# Altium PCB SD171-5.0PCB2.PcbDoc (part 5 of 5)
Units mm, origin at the board's own origin, x right, y up, seen from the top; angles counter-clockwise.
Board outline 152.27 x 99.6 mm, 6 copper layers (Top Layer, InternalPlane1, Mid-Layer 1, Mid-Layer 2, InternalPlane2, Bottom Layer); 325 components, 250 nets, 1794 pads, 490 vias.
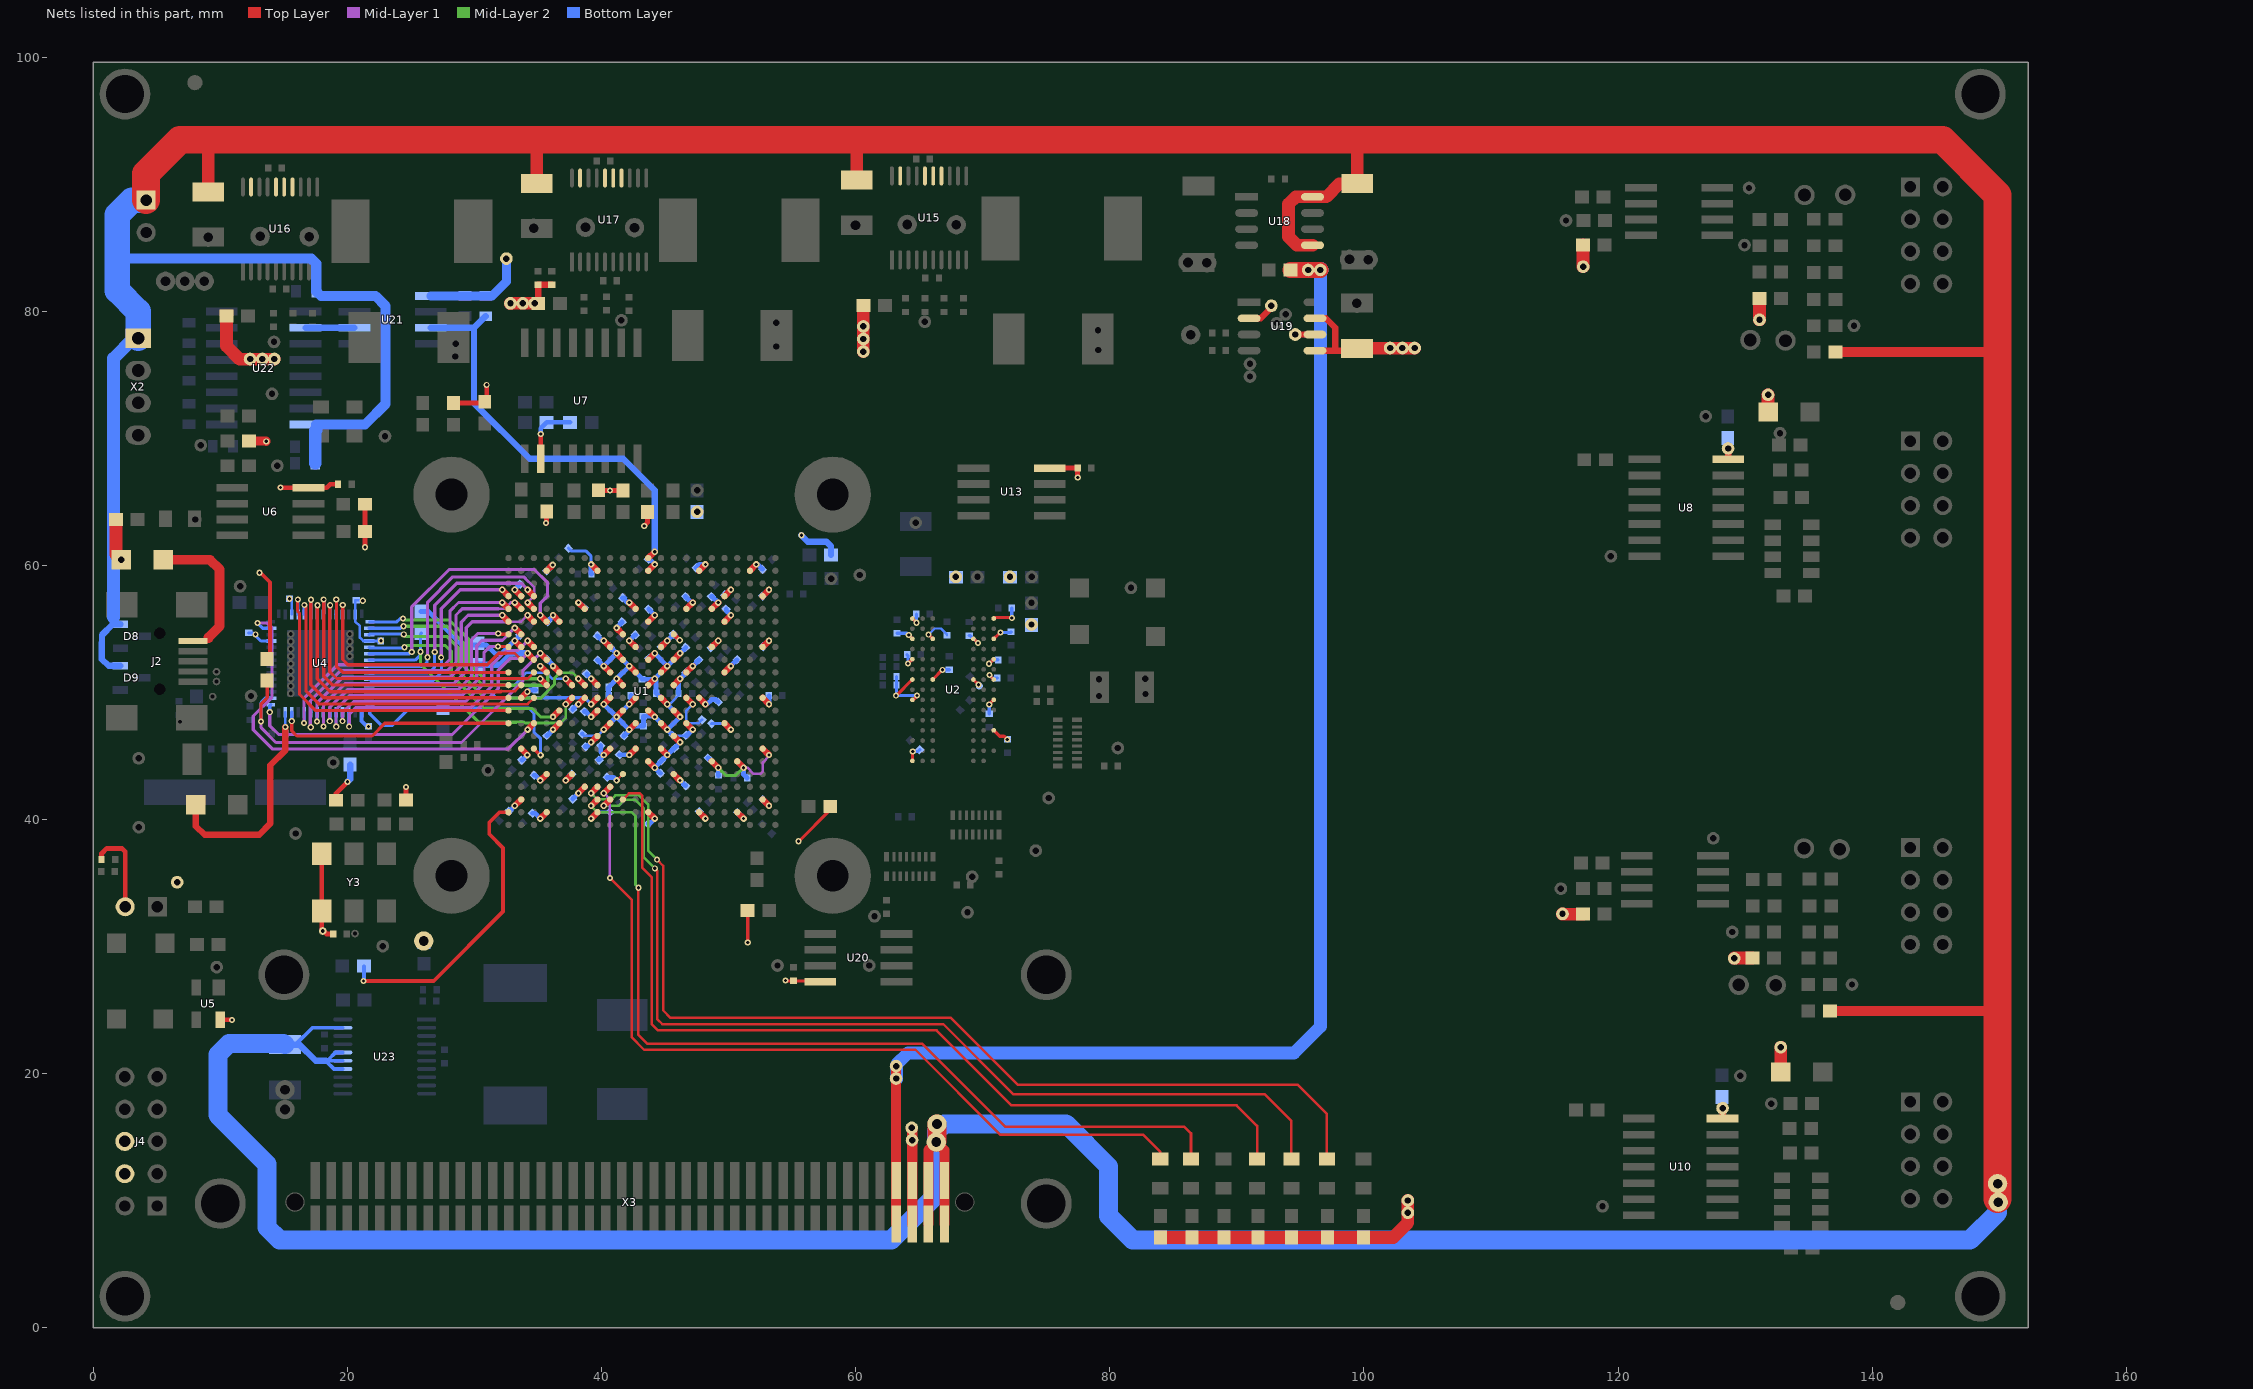
[diagram p9: the nets of this part, all layers, seen from the top]

## Via types
v1: diameter 0.508, hole 0.254, Top Layer to Bottom Layer, 259 vias
v2: diameter 0.483, hole 0.254, Top Layer to Bottom Layer, 230 vias
v3: diameter 0.483, hole 0.254, Top Layer to Bottom Layer, tented top, 1 vias

## Nets (pads, with @x,y where several pads share a name; then routed paths per layer and width w, separated by ;. In a path a pad name is that pad's centre, name@x,y a point inside that pad or via, vN(x,y) a via of type N, cw(c..) or ccw(c..) an arc to the next point about the centre after c; other vN are vias at no path point) (continued)
TEST3: D15.2 U1.C13 | length 73.7
  Top Layer w0.203: U1.C13@41.68,41.589 42.159,42.067 43.023,42.067 43.201,41.889 43.201,36.224 43.942,35.484 43.942,23.927 44.45,23.419 66.37,23.419 72.263,17.526 89.967,17.526 91.592,15.9 D15.2@91.592,13.284
TEST4: D16.2 U1.C14 | length 77.6
  Top Layer w0.203: v2(44.196,36.17) 44.399,35.966 44.399,24.282 44.78,23.901 66.904,23.901 72.415,18.39 92.202,18.39 94.285,16.307 D16.2@94.285,13.284
  Top Layer w0.5: v1(40.18,41.089) U1.C14@40.68,41.589
  Mid-Layer 2 w0.203: v1(40.18,41.089) 41.317,41.089 41.808,41.58 42.621,41.58 43.332,40.869 43.332,37.033 v2(44.196,36.17)
TEST5: D12.2 U1.D14 | length 66.7
  Top Layer w0.203: v2(40.665,35.408) 42.367,33.706 42.367,22.885 43.358,21.895 64.694,21.895 71.374,15.215 82.601,15.215 83.972,13.843 D12.2@83.972,13.284
  Top Layer w0.5: v1(40.18,42.089) U1.D14@40.68,42.589
  Mid-Layer 1 w0.203: v1(40.18,42.089) 40.663,41.606 40.663,35.41 v2(40.665,35.408)
TEST6: D13.2 U1.C15 | length 70.6
  Top Layer w0.203: v2(42.901,34.646) 42.901,23.063 43.612,22.352 65.253,22.352 71.755,15.85 85.852,15.85 86.385,15.316 D13.2@86.385,13.284
  Top Layer w0.5: v1(39.18,41.089) U1.C15@39.68,41.589
  Mid-Layer 2 w0.203: v1(39.18,41.089) 39.697,40.571 42.38,40.571 42.663,40.289 42.663,40.268 42.672,40.259 42.672,34.874 v2(42.901,34.646)
TEST7: D17.2 U1.D15 | length 81.7
  Top Layer w0.203: v2(44.374,36.855) 44.856,36.373 44.856,24.994 45.441,24.409 67.488,24.409 72.746,19.152 94.767,19.152 97.079,16.84 D17.2@97.079,13.284
  Top Layer w0.5: v1(39.18,42.089) U1.D15@39.68,42.589
  Mid-Layer 2 w0.203: v1(39.18,42.089) 39.663,41.606 40.793,41.606 41.097,41.91 42.951,41.91 43.663,41.199 43.663,37.567 v2(44.374,36.855)
TXD: U21.6 U22.10 | length 3.8
  Bottom Layer w0.508: U22.10@16.713,78.715 16.721,78.707 U21.6@20.558,78.707
TXD0: R88.1 U1.AB11 U21.3 | length 33.2
  Top Layer w0.5: U1.AB11@43.68,60.589 v1(44.18,61.089)
  Bottom Layer w0.508: U21.3@26.558,78.707 29.964,78.707 ; R88.1@30.886,79.629 29.964,78.707 ; v1(44.18,61.089) 44.18,65.929 41.707,68.402 34.341,68.402 29.964,72.779 29.964,78.707
UD0: U1.K22 U4.18 | length 25.7
  Top Layer w0.254: v2(16.104,57.328) 16.078,57.302 16.078,56.413 16.231,56.261 16.231,49.855 17.497,48.589 U1.K22@32.68,48.589
  Bottom Layer w0.254: v2(16.104,57.328) 16.078,57.328 16.117,57.289 U4.18@16.117,56.159
UD1: U1.L20 U4.19 | length 26.1
  Top Layer w0.203: 32.309,49.098 34.189,49.098 U1.L20@34.68,49.589
  Top Layer w0.254: v2(16.612,56.896) 16.739,56.77 16.739,55.524 16.739,50.14 17.78,49.098 32.309,49.098
  Bottom Layer w0.254: v2(16.612,56.896) 16.612,56.164 U4.19@16.617,56.159
UD2: U1.L22 U4.20 | length 23.9
  Top Layer w0.254: v2(17.145,57.302) 17.12,57.328 17.12,50.622 18.153,49.589 U1.L22@32.68,49.589
  Bottom Layer w0.254: U4.20@17.117,56.159 17.145,56.187 v2(17.145,57.302)
UD3: U1.M21 U4.21 | length 23.3
  Top Layer w0.203: 32.106,50.114 32.11,50.11 33.201,50.11 U1.M21@33.68,50.589
  Top Layer w0.254: v2(17.653,56.871) 17.628,56.871 17.628,51.079 18.644,50.063 30.658,50.063 32.063,50.063 32.11,50.11
  Bottom Layer w0.254: U4.21@17.617,56.159 17.617,56.86 17.628,56.871 v2(17.653,56.871)
UD4: U1.M22 U4.22 | length 22.1
  Top Layer w0.254: v2(18.136,57.328) 18.148,57.315 18.148,51.295 18.855,50.589 U1.M22@32.68,50.589
  Bottom Layer w0.254: U4.22@18.117,56.159 18.148,56.191 18.148,57.34 v2(18.136,57.328)
UD5: U1.N20 U4.23 | length 22.4
  Top Layer w0.203: 32.238,51.11 34.201,51.11 U1.N20@34.68,51.589
  Top Layer w0.254: v2(18.644,56.871) 18.618,56.845 18.618,51.638 19.146,51.11 32.238,51.11
  Bottom Layer w0.254: U4.23@18.617,56.159 18.617,56.844 v2(18.644,56.871)
UD6: U1.N22 U4.24 | length 20.2
  Top Layer w0.254: v2(19.126,57.328) 19.139,57.315 19.139,52.083 19.633,51.589 U1.N22@32.68,51.589
  Bottom Layer w0.254: U4.24@19.117,56.159 19.139,56.181 19.139,57.315 v2(19.126,57.328)
UD7: U1.P21 U4.25 | length 19.8
  Top Layer w0.203: 32.467,53.089 33.18,53.089 U1.P21@33.68,52.589
  Top Layer w0.254: v2(19.634,56.896) 19.634,52.603 20.041,52.197 31.013,52.197 31.905,53.089 32.467,53.089
  Bottom Layer w0.254: U4.25@19.617,56.159 19.617,56.888 19.625,56.896 v2(19.634,56.896)
UD8: U1.R20 U4.45 | length 20.3
  Top Layer w0.5: v1(34.18,54.089) U1.R20@34.68,53.589
  Mid-Layer 1 w0.254: v2(20.142,47.32) 20.142,48.311 20.65,48.819 29.693,48.819 31.369,50.495 31.369,52.197 32.487,53.315 33.406,53.315 v1(34.18,54.089)
  Bottom Layer w0.254: U4.45@20.117,48.459 20.117,47.345 v2(20.142,47.32)
UD9: U1.R22 U4.46 | length 18
  Top Layer w0.152: U1.R22@32.649,53.619 U1.R22@32.68,53.589
  Top Layer w0.254: v2(31.852,53.619) U1.R22@32.649,53.619
  Mid-Layer 1 w0.254: v2(19.609,47.752) 19.609,48.412 20.498,49.301 29.312,49.301 30.759,50.749 30.759,53.188 31.191,53.619 v2(31.852,53.619)
  Bottom Layer w0.254: v2(19.609,47.752) 19.617,47.76 U4.46@19.617,48.459
UD10: U1.T21 U4.47 | length 21.6
  Top Layer w0.5: v1(33.18,55.089) U1.T21@33.68,54.589
  Mid-Layer 1 w0.254: v2(19.126,47.32) 19.113,47.333 19.113,48.679 20.193,49.759 29.007,49.759 30.175,50.927 30.175,53.696 30.594,54.115 32.206,54.115 v1(33.18,55.089)
  Bottom Layer w0.254: U4.47@19.117,48.459 19.113,48.456 19.113,47.307 v2(19.126,47.32)
UD11: U1.T22 U4.48 | length 20
  Top Layer w0.254: v2(31.877,54.661) 31.949,54.589 U1.T22@32.68,54.589
  Mid-Layer 1 w0.254: v2(18.618,47.752) 18.618,48.844 20.015,50.241 28.727,50.241 29.769,51.283 29.769,54.153 30.277,54.661 30.836,54.661 v2(31.877,54.661)
  Bottom Layer w0.254: U4.48@18.617,48.459 v2(18.618,47.752) v2(18.618,47.752)
UD12: U1.U20 U4.49 | length 24.5
  Top Layer w0.5: v1(34.18,56.089) U1.U20@34.68,55.589
  Mid-Layer 1 w0.203: 32.69,55.575 33.666,55.575 v1(34.18,56.089)
  Mid-Layer 1 w0.254: v2(18.117,47.339) 18.117,49.003 19.812,50.698 28.372,50.698 29.362,51.689 29.362,55.118 29.825,55.581 32.684,55.581 32.69,55.575
  Bottom Layer w0.254: v2(18.117,47.339) U4.49@18.117,48.459
UD13: U1.U22 U4.50 | length 22.4
  Top Layer w0.5: v1(32.18,56.089) U1.U22@32.68,55.589
  Mid-Layer 1 w0.254: v2(17.602,47.727) 17.602,49.174 19.634,51.206 28.092,51.206 28.956,52.07 28.956,55.55 29.495,56.089 v1(32.18,56.089)
  Bottom Layer w0.254: v2(17.602,47.727) 17.606,47.727 17.617,47.737 U4.50@17.617,48.459
UD14: U1.V21 U4.51 | length 25.5
  Top Layer w0.5: v1(33.18,57.089) U1.V21@33.68,56.589
  Mid-Layer 1 w0.203: 31.877,56.591 32.365,56.591 32.862,57.089 v1(33.18,57.089)
  Mid-Layer 1 w0.254: v2(17.12,47.269) 17.081,47.307 17.081,49.34 19.456,51.714 27.864,51.714 28.55,52.4 28.55,56.109 29.032,56.591 31.877,56.591
  Bottom Layer w0.254: U4.51@17.117,48.459 17.107,48.449 17.107,47.282 v2(17.12,47.269)
UD15: U1.V22 U4.52 | length 24.5
  Top Layer w0.5: v1(32.18,57.089) U1.V22@32.68,56.589
  Mid-Layer 1 w0.254: v2(16.586,47.6) 16.586,49.555 19.228,52.197 27.661,52.197 28.067,52.603 28.067,56.413 28.742,57.089 v1(32.18,57.089)
  Bottom Layer w0.254: U4.52@16.617,48.459 16.617,47.63 16.612,47.625 v2@16.637,47.625
USB3V3: C47.2 C48.2 C49.2 C50.2 C51.2 C52.2 L2.2 pad.2@26.01,30.455 R94.2 U4.11 U4.17 U4.27 U4.32 U4.43 U4.55 | length 28.3
  Top Layer w0.203: v2(21.209,57.226) v2@21.234,57.201
  Top Layer w0.5: L2.2@8.077,41.173 8.077,39.497 8.763,38.811 13.056,38.811 13.945,39.7 13.945,44.272 15.117,45.445 v2(15.117,47.295)
  Bottom Layer w0.203: U4.55@15.117,48.459 v2(15.117,47.295) 15.117,46.776 C49.2@15.131,46.762 ; C52.2@15.375,57.455 15.617,57.213 U4.17@15.617,56.159 ; v2(21.209,57.226) 21.209,57.252 21.201,57.259 20.625,57.259 20.617,57.251 U4.27@20.617,56.159 20.617,55.608 20.98,55.245 20.98,54.331 21.252,54.059 U4.32@21.717,54.059 22.622,54.059 v2(22.639,54.076)
  Bottom Layer w0.254: C50.2@12.242,54.686 12.573,54.686 13.2,54.059 U4.11@14.017,54.059
  Bottom Layer w0.3: U4.43@21.117,48.409 21.117,47.777 21.556,47.338 v2(21.666,47.338)
  other v2: 12.776,54.585 15.444,57.386
USB5V: J2.1 L3.1 | length 10.5
  Top Layer w0.762: L3.1@5.512,60.452 9.195,60.452 9.931,59.715 9.931,55.22 9.068,54.356 9.068,54.28
USB_CLKOUT: U1.J22 U4.54 | length 18.9
  Top Layer w0.152: U1.J22@32.672,47.581 U1.J22@32.68,47.589
  Top Layer w0.254: v2@15.621,47.549 15.621,46.99 16.027,46.584 21.946,46.584 22.943,47.581 U1.J22@32.672,47.581
  Bottom Layer w0.254: U4.54@15.617,48.459 15.621,48.455 v2(15.621,47.752)
USB_EN: R96.1 U1.B22 | length 23.8
  Top Layer w0.3: v2(21.26,27.305) 26.797,27.305 32.258,32.766 32.258,37.77 31.166,38.862 31.166,39.776 31.978,40.589 U1.B22@32.68,40.589
  Bottom Layer w0.3: v2(21.26,27.305) 21.298,27.343 R96.1@21.298,28.473
USB_FADDR0: U1.W20 U4.37 | length 19.2
  Top Layer w0.5: v1(34.18,58.089) U1.W20@34.68,57.589
  Mid-Layer 1 w0.203: v1@34.03,58.238 v1(34.18,58.089)
  Mid-Layer 1 w0.254: v2(26.873,53.188) 26.873,56.871 28.6,58.598 33.671,58.598 v1@34.03,58.238
  Bottom Layer w0.254: U4.37@21.717,51.559 26.439,51.559 26.848,51.968 26.848,53.188 v2(26.873,53.188)
USB_FADDR1: U1.W22 U4.38 | length 17.1
  Top Layer w0.5: v1(32.18,58.089) U1.W22@32.68,57.589
  Mid-Layer 1 w0.254: v2(27.381,52.756) 27.381,56.591 28.879,58.089 v1(32.18,58.089)
  Bottom Layer w0.254: U4.38@21.717,51.059 21.823,50.953 26.773,50.953 27.407,51.587 27.407,52.73 v2(27.381,52.756)
USB_FLAGA#: U1.M19 U4.29 | length 17.3
  Top Layer w0.5: v1(35.18,51.089) U1.M19@35.68,50.589
  Mid-Layer 2 w0.254: v2(24.384,55.829) 24.384,55.804 24.473,55.715 28.029,55.715 29.616,54.127 29.616,52.248 30.775,51.089 v1(35.18,51.089)
  Bottom Layer w0.254: U4.29@21.767,55.559 23.886,55.559 24.155,55.829 v2(24.384,55.829)
USB_FLAGB#: U1.N19 U4.30 | length 19.4
  Top Layer w0.5: v1(35.18,52.089) U1.N19@35.68,51.589
  Mid-Layer 2 w0.254: v2(24.409,55.22) 27.813,55.22 29.185,53.848 29.185,52.045 30.648,50.581 35.442,50.581 35.763,50.902 35.763,51.506 v1(35.18,52.089)
  Bottom Layer w0.254: U4.30@21.717,55.059 24.173,55.059 24.333,55.22 v2(24.409,55.22)
USB_FLAGC#: U1.M16 U4.31 | length 21.7
  Top Layer w0.5: v1(38.18,51.089) U1.M16@38.68,50.589
  Mid-Layer 2 w0.203: 36.728,51.562 36.738,51.571 37.697,51.571 v1(38.18,51.089)
  Mid-Layer 2 w0.254: v2(24.435,54.585) 24.613,54.407 27.864,54.407 28.727,53.543 28.727,51.689 30.848,49.568 35.217,49.568 36.297,50.648 36.297,51.13 36.728,51.562
  Bottom Layer w0.254: U4.31@21.717,54.559 21.767,54.61 24.41,54.61 v2(24.435,54.585)
USB_FLAGD: U1.L15 U4.40 | length 18.6
  Top Layer w0.5: v1(39.18,49.089) U1.L15@39.68,49.589
  Bottom Layer w0.254: U4.40@21.717,50.059 31.246,50.059 31.737,49.568 34.368,49.568 34.397,49.597 38.672,49.597 v1(39.18,49.089)
USB_IFCLK: U1.J20 U4.13 | length 34.8
  Top Layer w0.5: v1(34.18,47.089) U1.J20@34.68,47.589
  Mid-Layer 1 w0.152: v1(34.18,47.089) v1@34.18,47.156
  Mid-Layer 1 w0.254: v2(12.929,55.474) 13.691,55.474 14.072,55.093 14.072,49.632 12.598,48.158 12.598,47.066 14.097,45.568 32.659,45.568 v1(34.18,47.089)
  Bottom Layer w0.254: v2(12.929,55.474) 13.343,55.059 U4.13@14.017,55.059
USB_INT0: U1.K18 U4.33 | length 18.7
  Top Layer w0.5: v1(36.18,48.089) U1.K18@36.68,48.589
  Mid-Layer 2 w0.254: v2(24.486,53.569) 24.625,53.708 27.711,53.708 28.169,53.251 28.169,51.359 30.776,48.751 34.536,48.751 35.198,48.089 v1(36.18,48.089)
  Bottom Layer w0.254: U4.33@21.717,53.559 21.759,53.518 24.308,53.518 24.409,53.619 24.46,53.569 v2(24.486,53.569)
USB_INT1: U1.U19 U4.34 | length 22.8
  Top Layer w0.5: v1(35.18,56.089) U1.U19@35.68,55.589
  Mid-Layer 1 w0.254: v2(25.07,53.188) 25.07,56.744 28.016,59.69 34.722,59.69 35.738,58.674 35.738,57.582 35.18,57.024 v1(35.18,56.089)
  Bottom Layer w0.254: U4.34@21.717,53.059 24.891,53.059 25.044,53.213 v2(25.07,53.188)
USB_PKEND: U1.M17 U4.39 | length 16.8
  Top Layer w0.5: v1(37.18,51.089) U1.M17@37.68,50.589
  Bottom Layer w0.203: U4.39@21.717,50.559 33.096,50.559 34.108,51.571 35.652,51.571 36.135,51.089 v1(37.18,51.089)
USB_RST#: R90.2 U1.G20 U4.42 | length 19
  Top Layer w0.254: U1.G20@34.68,45.589 35.184,45.085 v1(35.204,45.085)
  Bottom Layer w0.254: U4.42@21.767,49.059 21.767,48.337 22.682,47.422 23.546,47.422 24.917,48.793 34.262,48.793 34.688,48.367 34.688,46.878 35.204,46.362 v1(35.204,45.085)
USB_SLOE: R91.2 U1.L17 U4.35 | length 22.3
  Top Layer w0.254: v2@25.705,53.162 v2(25.756,53.213)
  Top Layer w0.5: v1(37.18,49.089) U1.L17@37.68,49.589
  Mid-Layer 2 w0.203: 33.299,47.676 33.299,47.701 33.885,47.701 33.98,47.606 36.786,47.606 37.18,48 v1(37.18,49.089)
  Mid-Layer 2 w0.254: v2(25.756,53.213) 25.756,52.248 30.328,47.676 33.299,47.676
  Bottom Layer w0.254: U4.35@21.717,52.559 25.331,52.559 25.756,52.984 v2(25.756,53.213) 25.756,54.623 R91.2@25.806,54.673
USB_SLRD#: R92.2 U1.P20 U4.1 | length 30.7
  Top Layer w0.5: v1(34.18,53.089) U1.P20@34.68,52.589
  Mid-Layer 1 w0.254: v2(13.894,48.463) 13.894,47.396 14.58,46.711 28.27,46.711 31.877,50.317 31.877,51.765 32.817,52.705 33.796,52.705 v1(34.18,53.089)
  Bottom Layer w0.254: v2(13.894,48.463) 13.894,48.986 U4.1@13.967,49.059
  Bottom Layer w0.5: R92.2@30.277,52.184 32.042,52.184 32.947,53.089 v1(34.18,53.089)
USB_SLWR#: R93.2 U1.P19 U4.2 | length 32.9
  Top Layer w0.254: v2(13.208,47.727) 13.208,49.124 13.691,49.606 R93.2@13.691,50.94
  Top Layer w0.5: v1(35.18,53.089) U1.P19@35.68,52.589
  Mid-Layer 1 w0.254: v2(13.208,47.727) 13.208,47.244 14.376,46.076 28.981,46.076 33.816,50.91 33.816,51.718 35.18,53.082 v1(35.18,53.089)
  Bottom Layer w0.254: v2(13.208,47.727) 13.208,49.225 13.542,49.559 U4.2@14.017,49.559
USB_WU2: U1.V20 U4.36 | length 21.1
  Top Layer w0.5: v1(34.18,57.089) U1.V20@34.68,56.589
  Mid-Layer 1 w0.203: v1(34.18,57.089) 34.697,57.606 34.697,58.292 34.246,58.743
  Mid-Layer 1 w0.254: v2(26.314,52.781) 26.314,57.125 28.296,59.106 33.884,59.106 34.246,58.743
  Bottom Layer w0.203: v2@26.264,52.73 v2(26.314,52.781)
  Bottom Layer w0.254: U4.36@21.717,52.059 25.948,52.059 26.264,52.375 v2@26.264,52.73
VCC1V2: C171.2 C172.2 C173.2 C174.2 C175.2 C176.2 C177.2 C178.2 C179.2 C180.2 C181.2 C182.2 C183.2 C184.2 C185.2 C186.2 C187.2 C188.2 C189.2 C190.2 C191.2 pad.0@32.831,80.63 pad.0@33.807,80.63 pad.0@34.747,80.63 pad.0@47.523,64.224 R77.2 U1.J8 U1.J10 U1.J12 U1.J14 U1.K9 U1.K11 U1.K13 U1.L10 U1.L12 U1.L14 U1.M9 U1.M11 U1.M13 U1.N10 U1.N12 U1.N14 U1.P9 U1.P11 U1.P13 U1.R14 | length 60.1
  Top Layer w0.152: v1(41.18,51.089) v1@41.343,50.925
  Top Layer w0.5: R77.2@35.016,80.63 C191.2@35.016,82.104 C190.2@36.08,82.104 ; v1(40.18,47.089) U1.J14@40.68,47.589 ; v1(40.18,49.089) U1.L14@40.68,49.589 ; v1(40.18,52.089) U1.N14@40.68,51.589 ; v1(40.18,54.089) U1.R14@40.68,53.589 ; v1(41.18,48.089) U1.K13@41.68,48.589 ; v1(41.18,53.089) U1.P13@41.68,52.589 ; v1@41.343,50.925 U1.M13@41.68,50.589 ; v1(42.18,47.089) U1.J12@42.68,47.589 ; v1(42.18,49.089) U1.L12@42.68,49.589 ; v1(42.18,52.089) U1.N12@42.68,51.589 ; U1.K11@43.68,48.589 v1(44.18,48.089) ; U1.M11@43.68,50.589 v1(44.18,51.089) ; U1.P11@43.68,52.589 v1(44.18,53.089) ; U1.J10@44.68,47.589 v1(45.18,47.089) ; U1.L10@44.68,49.589 v1(45.18,49.089) ; U1.N10@44.68,51.589 v1(45.18,52.089) ; U1.K9@45.68,48.589 v1(46.18,48.089) ; U1.M9@45.68,50.589 v1(46.18,51.089) ; U1.P9@45.68,52.589 v1(46.18,53.089) ; U1.J8@46.68,47.589 v1(47.18,47.089)
  Top Layer w1: pad.0@32.817,80.62 pad.0@32.831,80.605 ; pad.0@32.831,80.63 pad.0@33.807,80.63 pad.0@34.747,80.63 34.999,80.63 R77.2@35.016,80.614
  Bottom Layer w0.203: C189.2@38.48,46.762 38.639,46.604 39.695,46.604 v1(40.18,47.089) ; v1@45.18,49.156 45.422,49.156 46.058,49.791 C181.2@46.058,49.936 ; C186.2@45.63,46.622 45.646,46.606 46.606,46.606 C185.2@46.634,46.634
  Bottom Layer w0.381: C172.2@39.662,54.471 40.044,54.089 v1(40.18,54.089) 40.687,53.581 C177.2@40.704,53.581 40.704,53.565 v1(41.18,53.089) ; C174.2@39.687,52.566 40.165,52.089 v1(40.18,52.089) v1(41.18,53.089) ; v1(40.18,47.089) v1(41.18,48.089) ; C182.2@41.77,46.596 42.537,47.363 C184.2@43.307,47.363 43.307,48.116 C179.2@43.282,48.141 44.128,48.141 v1(44.18,48.089) v1(45.18,47.089) ; v1@42.221,47.048 v1(41.18,48.089) ; C178.2@42.309,49.784 42.309,49.218 v1(42.18,49.089) v1(41.18,48.089) ; C173.2@43.726,52.718 43.81,52.718 v1(44.18,53.089) v1(45.18,52.089) ; 44.94,49.301 C180.2@44.292,49.949 44.292,50.976 v1(44.18,51.089) ; v1@45.18,49.156 v1(45.18,49.089) v1(46.18,48.089) v1(45.18,47.089) ; C186.2@45.63,46.622 45.18,47.072 v1(45.18,47.089) ; C181.2@46.058,49.936 v1@46.058,50.967 ; v1(46.18,51.089) 46.634,51.543 C188.2@46.634,51.587 ; C187.2@46.622,53.556 46.622,53.531 v1(46.18,53.089) v1(45.18,52.089) ; C185.2@46.634,46.634 46.726,46.634 v1(47.18,47.089) ; v1(41.18,48.089) v1(40.18,49.089) 40.556,49.465 C183.2@40.556,49.759 C176.2@40.556,50.419 41.18,51.043 v1(41.18,51.089) v1(42.18,52.089) ; v1(41.18,53.089) v1(42.18,52.089) ; v1(42.18,52.089) 43.193,51.076 C175.2@43.193,51.05 44.141,51.05 v1(44.18,51.089) ; v1(44.18,51.089) v1(45.18,52.089)
VCC1V8: C88.2 C89.2 C90.2 C91.2 C92.2 C93.2 C94.2 C95.2 C96.2 C97.2 C98.2 C99.2 C100.2 C101.2 C102.2 C103.2 C104.2 C151.2 C152.2 C153.2 C154.2 C155.2 C156.2 C157.2 C158.2 C159.2 C160.2 C161.2 C162.2 C211.1 C218.2 pad.0@60.603,76.837 pad.0@60.603,77.826 pad.0@60.603,78.816 pad.0@67.882,59.106 pad.0@72.149,59.106 pad.0@73.838,55.359 pad.0@102.057,77.114 pad.0@103.022,77.114 pad.0@103.988,77.114 R75.2 U1.C2 U1.F4 U1.F6 U1.G2 U1.J5 U1.L2 U1.L7 U1.N5 U1.R2 U1.U5 U1.W2 U2.A1 U2.A9 U2.C1 U2.C3 U2.C7 U2.C9 U2.E1 U2.E9 U2.G1 U2.G3 U2.G7 U2.G9 U2.J1 U2.J9 U2.M9 U2.R1 U19.5 U19.7 | length 64
  Top Layer w0.254: v2(63.17,49.759) 63.195,49.759 U2.G1@64.465,51.029 ; v2(64.11,52.299) 64.135,52.299 U2.E1@64.465,52.629 ; v2(64.178,54.535) 64.465,54.248 U2.C1@64.465,54.229 ; U2.R1@64.465,44.629 v2@64.465,45.339 ; U2.J1@64.465,49.429 64.542,49.429 64.817,49.704 v2(64.817,49.762) ; U2.A1@64.465,55.829 v2(64.795,55.499) ; v2(65.735,54.559) U2.C3@66.065,54.229 ; U2.G3@66.065,51.029 v2(66.827,51.791) ; U2.G7@69.265,51.029 v2(69.674,50.619) ; U2.C7@69.265,54.229 69.291,54.229 69.64,53.88 v2@69.64,53.873 ; v2(70.488,52.27) 70.506,52.27 U2.E9@70.865,52.629 ; v2(70.51,49.073) v2(70.51,49.073) U2.J9@70.865,49.429 ; v2(70.532,51.381) 70.532,51.362 U2.G9@70.865,51.029 ; U2.M9@70.865,47.029 71.336,46.558 ; U2.C9@70.865,54.229 v2@71.246,54.61 ; U2.A9@70.865,55.829 70.941,55.905 72.263,55.905 v2(72.288,55.88) ; 71.399,46.558 71.336,46.558 ; v2(71.933,46.304) 71.679,46.558 71.336,46.558
  Top Layer w0.5: U1.L7@47.68,49.589 v1(48.18,49.089) ; U1.F6@48.68,44.589 v1(49.18,44.089) ; U1.J5@49.68,47.589 v1(50.18,47.089) ; U1.N5@49.68,51.589 v1(50.18,52.089) ; U1.U5@49.68,55.589 v1(50.18,56.089) ; U1.F4@50.68,44.589 v1(51.18,44.089) ; U1.C2@52.68,41.589 v1(53.18,41.089) ; U1.G2@52.68,45.589 v1(53.18,45.089) ; U1.L2@52.68,49.589 v1(53.18,49.089) ; U1.R2@52.68,53.589 v1(53.18,54.089) ; U1.W2@52.68,57.589 v1(53.18,58.089) ; U19.5@96.145,76.911 99.263,76.911 C211.1@99.441,77.089 ; U19.7@96.145,79.451 97.003,79.451 97.739,78.715 97.739,76.937
  Top Layer w1: pad.0@60.603,76.811 R75.2@60.603,80.453 ; C211.1@99.441,77.089 pad.0@103.988,77.089
  Mid-Layer 1 w0.203: v1(51.18,44.089) 51.491,44.089 51.974,43.606 52.496,43.606 52.697,43.807 52.697,44.519 53.18,45.001 v1(53.18,45.089)
  Mid-Layer 1 w0.254: v2(64.795,55.499) v2@64.821,55.524 ; v2(64.817,49.762) v2@64.825,49.762 ; v2(69.674,50.619) v2@69.692,50.602 ; v2@70.485,49.073 v2(70.51,49.073)
  Mid-Layer 2 w0.254: v1(49.18,44.089) 49.784,43.485 50.576,43.485 v1(51.18,44.089)
  Bottom Layer w0.178: v2(65.735,54.559) 66.218,55.042 66.712,55.042 67.183,54.57 C98.2@67.183,54.516
  Bottom Layer w0.203: C158.2@48.653,47.561 48.663,47.571 49.697,47.571 v1(50.18,47.089)
  Bottom Layer w0.254: v2(63.17,49.759) v2@63.213,49.802 ; C100.2@63.213,51.258 C90.2@63.213,50.597 v2@63.213,49.802 ; C96.2@63.246,54.668 v2@64.045,54.668 ; C97.2@64.041,52.984 64.11,52.915 v2(64.11,52.299) ; v2(64.491,45.364) 64.896,45.364 C91.2@65.037,45.505 ; C101.2@64.778,56.184 64.778,55.517 v2(64.795,55.499) ; v2(64.817,49.762) 63.252,49.762 v2@63.213,49.802 ; v2(65.735,54.559) v2@65.735,54.661 ; v2(66.827,51.791) 66.835,51.798 C99.2@67.361,51.798 ; C103.2@68.936,54.491 69.022,54.491 v2@69.64,53.873 ; v2(70.488,52.27) 70.795,52.578 C93.2@71.204,52.578 ; C218.2@70.51,48.329 v2(70.51,49.073) ; v2(70.532,51.381) 70.758,51.155 C104.2@71.153,51.155 ; v2(71.399,54.737) 72.194,54.737 C94.2@72.237,54.78 ; C95.2@72.281,56.642 72.281,55.888 v2(72.288,55.88)
  Bottom Layer w0.381: v1(48.18,49.089) 48.296,49.089 48.661,49.454 48.997,49.454 C156.2@49.188,49.263 ; C159.2@48.386,44.857 49.155,44.089 v1(49.18,44.089) 49.18,43.496 C162.2@49.199,43.477 ; C153.2@49.81,56.567 49.81,56.459 v1(50.18,56.089) ; v1(50.18,52.089) 50.18,52.111 C155.2@50.66,52.591 ; v1(51.18,44.089) 51.18,43.555 C161.2@51.453,43.282 ; C152.2@52.666,57.594 52.686,57.594 v1(53.18,58.089) ; C160.2@52.704,41.555 52.714,41.555 v1(53.18,41.089) ; C154.2@52.704,53.62 52.711,53.62 v1(53.18,54.089) ; C157.2@53.17,49.733 53.17,49.099 v1(53.18,49.089)
  other v2: 69.621,53.899
VCC2V5: pad.0@63.18,19.634 pad.0@63.18,20.61 pad.0@95.606,83.261 pad.0@96.571,83.261 R78.1 X3.7 X3.8 | length 111.1
  Top Layer w0.8: X3.7@63.18,8.191 X3.8@63.18,11.621 pad.0@63.18,20.61 pad.0@63.195,20.625
  Top Layer w1.27: R78.1@94.207,83.247 96.556,83.247 pad.0@96.571,83.261
  Bottom Layer w1: pad.0@63.221,19.583 63.221,20.752 64.11,21.641 94.488,21.641 96.571,23.724 96.571,54.966 pad.0@96.571,83.261
  Bottom Layer w1.27: pad.0@95.606,83.261 pad.0@96.571,83.261
VCC3V3: C53.1 C54.2 C59.1 C60.2 C61.2 C105.2 C106.2 C107.2 C108.2 C109.2 C110.2 C111.2 C112.2 C113.2 C114.2 C115.2 C116.2 C117.2 C118.2 C119.2 C120.2 C121.2 C122.2 C123.2 C124.2 C125.2 C126.2 C127.2 C128.2 C129.2 C130.2 C131.2 C132.2 C133.2 C134.2 C135.2 C136.2 C137.2 C138.2 C139.2 C140.2 C141.2 C142.2 C143.2 C144.2 C145.2 C146.2 C147.2 C148.2 C149.2 C150.2 C214.1 C215.1 C216.2 C217.2 C220.1 J3.2 J4.4 J4.6 L4.1 L5.1 pad.0@6.604,35.077 pad.0@12.344,76.251 pad.0@13.31,76.251 pad.0@14.249,76.251 pad.0@18.059,31.242 pad.0@32.512,84.15 pad.0@64.44,14.783 pad.0@64.414,15.748 pad.0@92.71,80.442 pad.0@94.59,78.181 pad.0@103.454,9.068 pad.0@103.454,10.033 pad.0@115.621,32.588 pad.0@117.246,83.515 pad.0@128.219,17.297 pad.0@128.651,69.215 pad.0@129.134,29.083 pad.0@131.127,79.337 pad.0@131.801,73.431 pad.0@132.791,22.098 R7.2 R9.2 R15.2 R17.1 R31.1 R33.1 R34.1 R35.2 R37.1 R38.1 R41.2 R42.2 R43.2 R46.2 R47.2 R49.2 R51.2 R57.2 R63.2 R64.2 R76.2 R79.1 R80.1 R81.1 R82.1 R83.1 R84.1 R85.1 R88.2 R91.1 R92.1 R93.1 U1.AA3 U1.AA7 U1.AA11 U1.AA15 U1.AA19 U1.B4 U1.B7 U1.B11 U1.B15 U1.B19 U1.C21 U1.D16 U1.E9 U1.E13 U1.E17 U1.E19 U1.F11 U1.G10 U1.G12 U1.G14 U1.G21 U1.H9 U1.H15 U1.J18 U1.K15 U1.L8 U1.L16 U1.L21 U1.M15 U1.N8 U1.N18 U1.R6 U1.R10 U1.R12 U1.R21 U1.T9 U1.T13 U1.U11 U1.U18 U1.V6 U1.V8 U1.V12 U1.V16 U1.W5 U1.W21 U5.4 U6.8 U7.2 U8.14 U10.14 U13.8 U19.2 U19.6 U20.8 U21.1 X3.5 X3.6 Y3.1 Y3.6 | length 203.9
  Top Layer w0.152: v1@36.137,60.046 v1(36.17,60.046) ; v1(41.18,43.089) U1.E13@41.68,43.589
  Top Layer w0.254: R31.1@51.498,32.868 51.498,30.34 v2(51.511,30.328) ; v2(54.483,27.356) 54.44,27.313 C54.2@55.092,27.313 57.149,27.313 U20.8@57.21,27.251 ; v2(55.499,38.303) 55.499,38.278 58.001,40.78 R33.1@58.001,41.046
  Top Layer w0.3: v2(13.081,59.436) 13.157,59.436 13.914,58.679 13.914,52.865 R93.1@13.691,52.642
  Top Layer w0.381: C59.1@0.653,36.88 0.653,37.33 1.067,37.744 2.261,37.744 2.515,37.49 J3.2@2.515,33.147 ; U5.4@10.008,24.257 10.897,24.257 v2(10.922,24.232) ; v2(14.729,66.139) 14.71,66.139 14.71,66.119 U6.8@16.932,66.119 18.367,66.119 18.644,66.396 C61.2@19.261,66.396 ; Y3.6@17.983,37.317 Y3.1@17.983,32.817 17.983,31.394 18.364,31.014 C60.2@18.88,31.014 ; R15.2@19.113,41.529 19.113,42.075 v2(20.015,42.977) ; R37.1@21.374,64.821 21.374,61.43 21.387,61.417 v2(21.387,61.443) ; v2(24.613,42.57) 24.625,42.558 R17.1@24.625,41.554 ; R43.2@28.346,72.784 30.709,72.784 30.963,73.038 v2(30.963,74.219) ; U7.2@35.215,68.388 v2(35.215,70.347) ; v2(35.636,63.348) 35.662,63.322 35.662,64.224 R49.2@35.687,64.249 ; R51.2@39.751,65.926 39.776,65.9 v2(40.665,65.9) R64.2@41.681,65.9 ; v2(43.358,63.119) 43.612,63.373 R47.2@43.612,64.198 ; U1.T9@45.68,54.589 45.69,54.589 v1(46.152,54.127) ; U13.8@75.276,67.669 77.459,67.669 77.445,67.654 77.445,66.904 v2(77.47,66.929)
  Top Layer w0.5: v1(33.18,41.089) U1.C21@33.68,41.589 ; v1(33.18,54.089) U1.R21@33.68,53.589 ; v1(33.18,58.089) U1.W21@33.68,57.589 ; U1.G21@33.68,45.568 U1.G21@33.68,45.589 v1@34.163,45.106 ; U1.L21@33.68,49.589 33.688,49.589 v2(34.163,50.063) ; v1(35.18,40.089) U1.B19@35.68,40.589 ; v1(35.18,43.089) U1.E19@35.68,43.589 ; U1.AA19@35.68,59.589 v1@36.137,60.046 ; v1(36.18,47.089) U1.J18@36.68,47.589 ; v1(36.18,52.089) U1.N18@36.68,51.589 ; v1(36.18,56.089) U1.U18@36.68,55.589 ; v1(37.18,43.089) U1.E17@37.68,43.589 ; v1(38.18,42.089) U1.D16@38.68,42.589 ; v1(38.18,49.089) U1.L16@38.68,49.589 ; v1(38.18,57.089) U1.V16@38.68,56.589 ; v1(39.18,40.089) U1.B15@39.68,40.589 ; v1(39.18,46.089) U1.H15@39.68,46.589 ; v1(39.18,48.089) U1.K15@39.68,48.589 ; v1(39.18,51.089) U1.M15@39.68,50.589 ; v1(39.18,60.089) U1.AA15@39.68,59.589 ; v1(40.18,45.089) U1.G14@40.68,45.589 ; v1(41.18,55.089) U1.T13@41.68,54.589 ; v1(42.18,45.089) U1.G12@42.68,45.589 ; v1(42.18,54.089) U1.R12@42.68,53.589 ; v1(42.18,57.089) U1.V12@42.68,56.589 ; U1.B11@43.68,40.589 v1(44.18,40.089) ; U1.F11@43.68,44.589 v1(44.18,44.089) ; U1.U11@43.68,55.589 v1(44.18,56.089) ; U1.AA11@43.68,59.589 v1(44.18,60.089) ; U1.G10@44.68,45.589 v1(45.18,45.089) ; U1.R10@44.68,53.589 v1(45.18,54.089) ; U1.E9@45.68,43.589 v1(46.18,43.089) ; U1.H9@45.68,46.589 v1(46.18,46.089) ; U1.L8@46.68,49.589 v1(47.18,49.089) ; U1.N8@46.68,51.589 v1(47.18,52.089) ; U1.V8@46.68,56.589 v1(47.18,57.089) ; U1.B7@47.68,40.589 v1(48.18,40.089) ; U1.AA7@47.68,59.589 v1(48.18,60.089) ; U1.R6@48.68,53.589 v1(49.18,54.089) ; U1.V6@48.68,56.589 v1(49.18,57.089) ; U1.W5@49.68,57.589 v1(50.18,58.089) ; U1.B4@50.68,40.589 v1(51.18,40.089) ; U1.AA3@51.68,59.589 v1(52.18,60.089) ; U19.2@90.957,79.451 91.872,79.451 pad.0@92.659,80.239 ; pad.0@94.59,78.181 U19.6@96.145,78.181 ; U10.14@128.219,16.485 pad.0@128.219,17.297 ; U8.14@128.651,68.373 pad.0@128.651,69.215
  Top Layer w0.7: R35.2@12.27,69.785 13.604,69.785 v2(13.614,69.774)
  Top Layer w0.8: pad.0@64.414,15.748 64.45,15.712 X3.6@64.45,11.621 X3.5@64.45,8.191
  Top Layer w1: R76.2@10.488,79.64 10.488,77.269 11.532,76.225 pad.0@14.249,76.225 ; R79.1@83.998,7.125 102.298,7.125 103.454,8.28 pad.0@103.454,10.033 ; pad.0@115.621,32.588 115.621,32.563 R63.2@117.234,32.563 ; R57.2@117.234,85.217 117.234,83.503 pad.0@117.246,83.515 ; pad.0@129.134,29.108 R7.2@130.569,29.108 ; pad.0@131.127,79.337 R9.2@131.127,81.026 ; L4.1@131.801,72.085 pad.0@131.801,73.431 ; L5.1@132.791,20.142 pad.0@132.791,22.098
  Bottom Layer w0.203: v1(39.18,40.089) 39.18,40.221 39.561,40.602 C144.2@40.679,40.602 ; v1(47.18,49.089) 46.66,48.569 46.66,48.294 46.663,48.291 46.663,47.825 46.888,47.6 47.651,47.6 C146.2@47.918,47.866
  Bottom Layer w0.254: C120.2@37.401,61.354 37.604,61.15 38.748,61.15 39.18,60.718 v1(39.18,60.089)
  Bottom Layer w0.381: R91.1@25.806,56.375 26.403,56.375 29.032,53.746 30.934,53.746 31.62,53.061 32.116,53.061 33.144,54.089 v1(33.18,54.089) 33.567,54.476 C113.2@33.567,54.521 ; C142.2@32.702,40.678 32.769,40.678 v1(33.18,41.089) ; v1(33.18,58.089) 33.18,58.148 C107.2@33.567,58.534 ; C133.2@33.718,44.691 33.769,44.691 v1(34.163,45.085) ; v2@34.315,50.215 C129.2@34.806,50.215 ; C143.2@34.556,40.5 34.769,40.5 v1(35.18,40.089) ; C134.2@34.683,43.497 34.771,43.497 v1(35.18,43.089) ; v2(35.215,70.347) 35.215,70.788 35.7,71.272 C105.2@37.529,71.272 ; C131.2@35.7,46.621 35.712,46.621 v1(36.18,47.089) ; C106.2@35.7,59.6 35.724,59.6 v1(36.17,60.046) ; C115.2@35.713,52.63 36.18,52.163 v1(36.18,52.089) ; C108.2@35.776,55.587 36.18,55.991 v1(36.18,56.089) ; v1(37.18,43.089) 37.655,43.564 C140.2@37.655,43.574 ; C141.2@37.731,41.618 37.731,41.64 v1(38.18,42.089) ; C130.2@37.731,48.679 38.141,49.089 v1(38.18,49.089) ; v1(38.18,57.089) 38.239,57.089 C109.2@38.634,56.694 ; C132.2@38.645,48.501 38.768,48.501 v1(39.18,48.089) ; C135.2@38.734,45.746 38.837,45.746 v1(39.18,46.089) ; C116.2@38.862,51.487 38.862,51.407 v1(39.18,51.089) ; v1(39.18,60.089) 39.18,59.365 C110.2@39.21,59.335 ; C137.2@39.75,44.73 39.821,44.73 v1(40.18,45.089) 39.944,45.325 C136.2@39.944,45.828 ; C139.2@40.441,43.326 40.943,43.326 v1(41.18,43.089) ; v1(41.18,55.089) 41.619,55.527 C117.2@41.619,55.563 ; C138.2@41.401,45.111 42.158,45.111 v1(42.18,45.089) ; C111.2@41.813,57.456 C111.2@41.656,57.456 42.023,57.089 v1(42.18,57.089) ; v1(42.18,54.089) 42.202,54.089 C118.2@42.66,54.547 ; C150.2@43.675,39.688 43.779,39.688 v1(44.18,40.089) ; C112.2@43.687,60.478 43.791,60.478 v1(44.18,60.089) ; C114.2@43.714,56.567 43.714,56.555 v1(44.18,56.089) ; C148.2@44.641,43.649 44.62,43.649 v1(44.18,44.089) v1(45.18,45.089) v1(46.18,46.089) ; C125.2@44.704,53.646 44.737,53.646 v1(45.18,54.089) 45.657,54.566 C124.2@45.657,54.597 46.127,54.127 v1(46.152,54.127) ; v1(46.18,43.089) 46.584,42.685 C149.2@46.621,42.685 ; C123.2@46.608,57.557 47.076,57.089 v1(47.18,57.089) ; v1(47.18,52.089) 47.187,52.089 C127.2@47.663,52.565 ; C119.2@47.442,59.828 47.703,60.089 v1(48.18,60.089) ; C217.2@47.689,40.627 47.689,40.58 v1(48.18,40.089) ; C128.2@48.628,53.53 49.18,54.081 v1(49.18,54.089) ; C121.2@48.64,57.557 48.712,57.557 v1(49.18,57.089) ; C122.2@49.695,57.697 49.788,57.697 v1(50.18,58.089) ; C216.2@50.699,40.565 50.704,40.565 v1(51.18,40.089) ; v1(52.18,60.089) 52.282,60.089 C126.2@52.668,59.703
  Bottom Layer w0.5: v2(20.015,42.977) 20.218,43.18 R34.1@20.218,44.336 ; v2(55.728,62.382) 56.236,61.874 57.709,61.874 58.063,61.521 R41.2@58.063,60.844
  Bottom Layer w0.7: U21.1@26.558,81.207 30.886,81.207 31.372,81.207 32.512,82.347 pad.0@32.512,84.15
VCC5V: C165.1 C194.1 C201.1 C208.1 C221.1 C224.2 C231.1 D8.2 D9.2 L3.2 pad.0@2.21,60.452 pad.0@149.911,9.906 pad.1@149.86,11.354 pad.2@66.345,14.63 pad.7 R29.2 R55.1 R61.1 R89.2 U15.14 U15.15 U15.16 U15.19 U16.14 U16.15 U16.16 U16.19 U17.14 U17.15 U17.16 U17.19 U18.5 U18.8 U21.8 U22.16 U23.14 U23.15 U23.16 U23.19 X1.1 X2.1 X3.1 X3.2 X3.3 X3.4 | length 566.9
  Top Layer w0.8: X3.3@65.72,8.191 X3.4@65.72,11.621 65.72,14.006 pad.2@66.345,14.63 66.99,13.985 X3.2@66.99,11.621 X3.1@66.99,8.191 ; R61.1@136.665,24.943 149.708,24.943 149.835,24.816 ; R55.1@137.096,76.81 149.758,76.81 149.86,76.708
  Top Layer w1: R29.2@1.791,63.627 1.791,60.871 L3.2@2.21,60.452 ; C194.1@9.053,89.393 9.053,93.44 9.119,93.506 ; C201.1@34.91,90.079 34.91,93.186 35.23,93.506 ; C165.1@60.082,90.333 60.082,93.212 60.376,93.506 ; U18.5@95.953,85.202 94.731,85.202 94.056,85.877 94.056,88.443 94.626,89.012 U18.8@95.953,89.012 97.039,89.012 98.075,90.049 C208.1@99.466,90.049 99.466,93.429 99.543,93.506
  Top Layer w1.5: pad.2@66.345,14.63 66.396,14.681 pad.7@66.396,16.053
  Top Layer w2.2: X1.1@4.166,88.748 4.166,90.83 6.841,93.506 9.119,93.506 35.23,93.506 60.376,93.506 99.543,93.506 145.508,93.506 149.86,89.154 149.86,76.708 pad.1@149.86,11.354 pad.0@149.86,10.16
  Bottom Layer w0.3: C231.1@15.088,22.301 C231.1@15.519,22.301 ; C231.1@15.926,22.301 17.257,23.632 U23.19@19.638,23.632 ; 18.491,21.107 19.066,21.682 U23.16@19.638,21.682 ; U23.14@19.638,20.382 18.938,20.382 18.288,21.032 U23.15@19.638,21.032
  Bottom Layer w0.5: 1.6,55.93 1.534,55.864 1.534,55.382 ; D9.2@2.123,52.106 1.209,52.106 0.677,52.637 0.677,53.911 0.686,53.92 0.686,54.534 1.534,55.382 ; D8.2@2.148,55.382 1.534,55.382 ; C231.1@15.519,22.301 15.926,22.301 16.231,22.301 17.499,21.032 18.288,21.032
  Bottom Layer w0.8: 2.388,84.15 17.17,84.15 17.551,83.769 R89.2@17.551,81.585 17.929,81.207 U21.8@20.558,81.207 22.222,81.207 23.012,80.416 23.012,72.72 21.387,71.095 U22.16@17.551,71.095
  Bottom Layer w1: 1.6,55.93 1.6,76.302 3.18,77.881 X2.1@3.537,77.881 ; C224.2@17.475,68.047 17.475,70.333 17.475,70.586 17.551,70.663
  Bottom Layer w1.5: C231.1@15.088,22.301 14.986,22.403 10.693,22.403 9.804,21.513 9.804,16.765 13.665,12.903 13.665,7.925 14.67,6.92 62.8,6.92 66.345,10.465 pad.2@66.345,14.63 66.345,15.443 66.954,16.053 76.556,16.053 79.908,12.7 79.908,8.814 81.802,6.92 147.687,6.92 149.86,9.093 pad.1@149.86,11.354
  Bottom Layer w2: X2.1@3.537,77.881 3.537,80.004 1.905,81.636 1.905,87.605 3.048,88.748 X1.1@4.166,88.748
pads on no net: J2.7 J2.8 J2.9 J2.MH1 J2.MH2 J4.7 J4.8 R69.6 R69.7 R69.8 S1.0 S2.2 S3.2 S4.0 U1.A2 U1.A20 U1.A21 U1.AA4 U1.AA6 U1.AA8 U1.AA10 U1.AA12 U1.AA14 U1.AA16 U1.AA18 U1.AA21 U1.AB9 U1.AB10 U1.AB14 U1.AB15 U1.AB16 U1.AB17 U1.AB18 U1.AB19 U1.AB21 U1.B20 U1.B21 U1.C3 U1.C4 U1.C7 U1.C17 U1.C19 U1.C20 U1.C22 U1.D3 U1.D5 U1.D6 U1.D7 U1.D8 U1.D9 U1.D10 U1.D12 U1.D13 U1.D17 U1.D19 U1.D20 U1.D21 U1.D22 U1.E4 U1.E5 U1.E6 U1.E8 U1.E10 U1.E12 U1.E14 U1.E16 U1.E20 U1.E22 U1.F7 U1.F8 U1.F9 U1.F10 U1.F12 U1.F13 U1.F14 U1.F15 U1.F16 U1.F17 U1.F18 U1.F19 U1.F20 U1.F21 U1.F22 U1.G7 U1.G8 U1.G9 U1.G11 U1.G13 U1.G16 U1.G17 U1.G19 U1.G22 U1.H8 U1.H10 U1.H11 U1.H12 U1.H13 U1.H14 U1.H16 U1.H17 U1.H18 U1.H19 U1.H20 U1.J7 U1.J16 U1.J17 U1.J19 U1.K7 U1.K16 U1.K17 U1.K19 U1.K21 U1.L6 U1.L19 U1.M5 U1.M6 U1.M7 U1.M8 U1.M18 U1.M20 U1.N4 U1.N6 U1.N7 U1.N16 U1.P3 U1.P4 U1.P5 U1.P6 U1.P7 U1.P8 U1.P15 U1.P16 U1.P17 U1.P18 U1.P22 U1.R4 U1.R7 U1.R8 U1.R9 U1.R11 U1.R13 U1.R15 U1.R16 U1.R17 U1.R19 U1.T3 U1.T4 U1.T7 U1.T8 U1.T10 U1.T11 U1.T12 U1.T14 U1.T15 U1.T16 U1.T17 U1.T18 U1.T20 U1.U4 U1.U6 U1.U8 U1.U9 U1.U10 U1.U12 U1.U16 U1.U17 U1.V3 U1.V5 U1.V7 U1.V9 U1.V11 U1.V13 U1.V15 U1.V17 U1.V18 U1.V19 U1.W1 U1.W4 U1.W6 U1.W8 U1.W9 U1.W10 U1.W11 U1.W13 U1.W14 U1.W15 U1.W17 U1.W18 U1.Y3 U1.Y4 U1.Y5 U1.Y6 U1.Y7 U1.Y8 U1.Y9 U1.Y10 U1.Y11 U1.Y14 U1.Y15 U1.Y16 U1.Y17 U1.Y18 U1.Y19 U1.Y20 U2.A2 U2.E2 U2.R7 U7.3 U7.4 U7.5 U7.6 U7.11 U7.12 U7.13 U7.14 U12.8 U13.5 U14.8 U15.3 U15.4 U15.18 U15.20 U16.3 U16.4 U16.18 U16.20 U17.3 U17.4 U17.18 U17.20 U18.4 U22.11 U22.12 U22.13 U22.14 U23.3 U23.4 U23.20 X3.51 X3.52 X3.55 X3.56 X3.57 X3.58 X3.63 X3.64 X3.67 X3.68 X3.A X3.B Y3.2

## Polygon pours and split planes (outlines as drawn)
DDR2_VTT on Top Layer "Top Layer-No Net" (solid, remove dead copper, pour order 1001): 62.179,34.9 62.154,34.874 62.154,33.401 64.77,33.401 68.123,33.401 68.174,33.452 68.199,33.477 68.199,34.544 68.174,34.569 68.174,34.925 62.205,34.925 62.179,34.9
DDR2_VTT on Top Layer "Top Layer-No Net" (solid, remove dead copper, pour order 1000): 80.264,51.664 78.181,51.664 78.105,51.664 78.105,45.136 78.105,43.688 77.851,43.434 77.749,43.332 75.26,43.332 73.228,43.332 72.39,42.494 72.009,42.113 72.009,40.665 72.009,38.303 71.831,38.125 71.78,38.075 70.282,38.075 67.158,38.075 67.107,38.024 66.573,37.49 66.548,37.49 66.548,34.62 66.624,34.544 66.65,34.519 68.199,34.519 68.199,35.128 68.224,35.154 68.224,36.093 68.224,36.297 68.351,36.424 68.428,36.5 71.247,36.5 72.288,36.5 72.898,37.109 73.304,37.516 73.304,39.649 73.304,41.808 73.889,42.393 73.914,42.418 78.181,42.418 79.451,42.418 79.807,42.774 79.807,44.272 79.807,51.638 79.781,51.664 79.629,51.664
GND on Top Layer "Top Layer-No Net" (solid, remove dead copper, pour order 1008): 67.259,91.262 67.259,89.357 67.259,89.179 66.929,88.849 66.04,88.849 62.484,88.849 61.824,88.189 61.29,87.655 61.29,87.478 61.29,82.728 61.747,82.271 61.874,82.144 62.865,82.144 62.941,82.144 63.094,82.296 63.094,84.201 63.094,84.912 63.5,85.319 64.033,85.852 66.065,85.852 68.555,85.852 68.834,86.131 68.834,87.071 68.834,89.154 69.012,89.332 68.986,89.357 68.986,91.262 67.259,91.262
GND on Top Layer "Top Layer-No Net" (solid, remove dead copper, pour order 1007): 42.088,91.11 42.088,89.713 41.554,89.179 41.097,88.722 38.964,88.722 37.465,88.722 37.262,88.519 36.779,88.036 36.779,87.681 36.779,87.605 36.474,87.3 36.449,87.274 36.043,87.274 36.043,85.852 35.966,85.776 36.855,84.887 36.855,82.779 36.855,82.474 37.135,82.194 37.262,82.067 37.567,82.067 37.694,82.067 37.821,82.194 37.871,82.245 37.871,83.591 37.871,84.963 38.1,85.192 38.583,85.674 40.284,85.674 43.155,85.674 43.459,85.979 43.536,86.055 43.536,86.69 43.536,89.459 43.764,89.687 43.764,91.11 42.088,91.11
GND on Top Layer "Top Layer-No Net" (solid, remove dead copper, pour order 1006): 16.326,90.399 16.326,90.373 16.18,90.227 16.18,88.722 16.18,88.697 15.494,88.011 15.291,87.808 13.081,87.808 11.405,87.808 10.998,87.401 11.024,87.376 11.024,86.741 10.871,86.589 10.084,86.589 7.823,86.589 7.772,86.538 7.772,84.811 10.262,84.811 11.125,83.947 11.125,82.017 11.125,81.813 11.252,81.686 11.811,81.686 11.836,81.686 11.989,81.839 11.989,82.093 11.989,84.226 12.217,84.455 12.446,84.684 14.3,84.684 17.424,84.684 17.653,84.912 17.78,85.039 17.78,85.242 17.78,90.399 17.755,90.424 16.326,90.424
NetC164_1 on Top Layer "Top Layer-No Net" (solid, remove dead copper, pour order 1005): 65.964,84.658 65.964,83.388 66.04,83.312 66.065,83.312 66.243,83.312 66.345,83.21 66.345,82.728 66.454,82.728 66.556,82.627 66.657,82.728 66.827,82.728 66.675,82.728 66.319,82.372 66.319,82.169 66.319,82.144 66.573,81.89 66.599,81.864 68.097,81.864 70.739,81.864 72.898,84.023 72.898,89.027 69.672,89.027 69.469,88.824 69.393,88.748 69.393,87.732 69.393,85.496 69.088,85.192 69.063,85.166 67.564,85.166 66.167,85.166 65.964,84.963 65.964,84.658
VCC5V on Top Layer "Top Layer-No Net" (solid, remove dead copper, pour order 1004): 60.985,91.084 62.357,91.084 62.459,90.983 62.484,90.957 62.484,90.018 62.484,89.865 62.636,89.713 62.941,89.713 63.043,89.713 63.348,90.018 63.373,90.043 63.627,90.043 63.652,90.043 63.932,89.764 63.957,89.738 65.227,89.738 65.227,89.992 65.303,90.068 65.303,90.348 65.303,91.262 66.904,91.262 66.904,89.408 66.7,89.205 63.652,89.205 61.722,89.205 60.985,89.941 60.985,91.084
NetC200_1 on Top Layer "Top Layer-No Net" (solid, remove dead copper, pour order 1003): 40.945,82.144 40.945,82.855 40.767,83.033 40.767,83.668 40.767,84.785 40.996,85.014 41.046,85.065 42.418,85.065 43.815,85.065 44.094,85.344 44.094,88.011 44.094,88.57 44.323,88.798 44.374,88.849 44.933,88.849 47.473,88.849 47.498,88.824 47.498,83.896 47.498,83.668 46.431,82.601 45.974,82.144 40.945,82.144 40.945,82.448 40.919,82.474
VCC5V on Top Layer "Top Layer-No Net" (solid, remove dead copper, pour order 1002): 36.068,90.83 37.135,90.83 37.262,90.703 37.287,90.678 37.287,90.068 37.287,89.764 37.414,89.637 37.49,89.56 37.77,89.56 37.871,89.56 38.176,89.865 38.202,89.891 38.43,89.891 38.456,89.891 38.608,89.738 38.786,89.56 39.091,89.56 39.878,89.56 40.107,89.789 40.107,91.059 41.732,91.059 41.732,89.916 41.732,89.814 41.072,89.154 36.424,89.154 36.297,89.154 36.068,89.383 36.068,90.83
NetC193_1 on Top Layer "Top Layer-No Net" (solid, remove dead copper, pour order 1001): 14.884,83.845 14.884,83.972 15.113,84.201 15.189,84.277 17.297,84.277 17.958,84.277 18.186,84.506 18.263,84.582 18.263,85.014 18.263,88.29 18.745,88.773 18.796,88.824 19.38,88.824 21.717,88.824 21.742,88.798 21.768,88.773 21.768,83.744 21.717,83.744 19.304,81.331 19.279,81.305 17.094,81.305 15.138,81.305 14.961,81.483 14.961,82.042 14.961,82.52 14.992,82.551 14.884,82.658 14.884,82.982 14.884,83.845
VCC5V on Top Layer "Top Layer-No Net" (solid, remove dead copper, pour order 1000): 9.779,90.17 10.643,90.17 10.846,90.17 11.049,89.967 11.227,89.789 11.227,89.23 11.227,88.976 11.379,88.824 11.43,88.773 11.938,88.773 11.989,88.773 12.294,89.078 12.294,89.179 12.573,89.179 12.573,89.103 12.573,89.078 12.802,88.849 12.827,88.824 14.021,88.824 14.046,88.824 14.199,88.976 14.249,89.027 14.249,89.154 14.249,89.205 14.275,89.23 14.224,89.281 14.224,90.018 14.224,90.399 15.824,90.399 15.824,88.824 15.367,88.367 15.316,88.316 12.573,88.316 10.617,88.316 10.287,88.646 9.779,88.646 9.779,90.17
NetC166_1 on Top Layer "Top Layer-No Net" (solid, remove dead copper, pour order 1008): 79.487,89.038 79.487,87.031 74.966,82.51 73.772,81.316 63.816,81.316 61.911,81.316 61.733,81.138 61.758,81.113 61.758,80.605 61.758,79.97 61.885,79.843 61.911,79.868 62.8,79.868 62.825,79.868 63.333,80.376 63.714,80.757 64.019,80.757 68.845,80.757 68.896,80.707 70.801,78.802 70.801,76.135 73.264,76.135 73.29,76.109 73.29,78.421 73.29,78.497 75.703,80.91 75.779,80.986 78.09,80.986 82.256,80.986 82.688,81.418 82.789,81.519 82.789,89.114 79.564,89.114 79.487,89.038
NetC202_1 on Top Layer "Top Layer-No Net" (solid, remove dead copper, pour order 1006): 54.138,88.835 54.138,87.895 47.382,81.138 47.128,81.392 41.87,81.392 36.206,81.392 36.079,81.265 36.13,81.215 36.13,80.122 37.247,80.122 37.273,80.097 38.06,80.884 38.136,80.884 42.835,80.884 43.038,80.681 45.528,78.192 45.528,76.058 47.941,76.058 47.991,76.008 48.093,76.109 48.093,78.344 48.093,78.395 50.506,80.808 50.811,81.113 54.9,81.113 56.881,81.113 57.262,81.494 57.288,81.519 57.288,88.835 54.138,88.835
NetC195_1 on Top Layer "Top Layer-No Net" (solid, remove dead copper, pour order 1004): 28.357,88.758 28.357,87.336 21.245,80.224 21.194,80.173 12.152,80.173 11.669,80.173 11.644,80.199 11.619,80.173 11.619,79.106 12.787,79.106 13.244,79.564 13.295,79.614 14.209,79.614 17.689,79.614 18.248,79.056 20.102,77.201 20.102,76.084 20.102,75.957 20.153,75.906 22.642,75.906 22.642,78.319 25.69,81.367 25.944,81.113 30.516,81.113 31.151,81.113 31.532,81.494 31.405,81.621 31.405,88.758 28.357,88.758
VCC3V3 on InternalPlane1 (split plane): 151.763,4.445 0.51,4.445 0.51,95.072 151.763,95.072
VCC1V8 on InternalPlane1 (split plane): 104.649,76.148 95.782,76.148 95.782,80.95 95.777,80.989 95.762,81.025 95.738,81.057 95.707,81.081 95.67,81.096 95.631,81.101 91.821,81.101 91.782,81.096 91.745,81.081 91.714,81.057 91.69,81.025 91.675,80.989 91.67,80.95 91.67,79.475 66.65,79.475 66.61,79.47 66.574,79.455 66.543,79.431 66.519,79.4 66.503,79.363 66.498,79.324 66.498,61.773 66.503,61.734 66.519,61.697 66.543,61.666 66.574,61.642 66.61,61.627 66.65,61.622 83.694,61.622 83.694,32.206 61.949,32.206 61.949,39.345 61.944,39.384 61.929,39.42 61.905,39.452 61.874,39.476 61.837,39.491 61.798,39.496 51.815,39.496 51.815,40.64 51.81,40.679 51.795,40.716 51.771,40.747 47.929,44.589 47.929,48.438 47.929,50.026 49.713,51.811 49.737,51.842 49.743,51.857 49.752,51.878 49.757,51.918 49.757,56.579 51.701,58.523 53.404,58.523 53.512,58.415 53.766,58.161 53.798,58.137 53.834,58.121 53.873,58.116 58.268,58.116 58.307,58.121 58.328,58.13 58.343,58.137 58.375,58.161 60.076,59.862 60.1,59.894 60.116,59.93 60.121,59.969 60.121,66.573 60.116,66.613 60.105,66.638 60.1,66.649 60.076,66.68 58.952,67.804 58.952,81.432 58.952,82.678 104.649,82.678
VCC1V2 on InternalPlane1 (split plane): 157 vertices, not listed, extent 32.028,46.176 48.236,82.348
USB3V3 on InternalPlane1 (split plane): 22.375,57.858 22.375,36.297 22.385,36.247 22.413,36.205 27.074,31.544 27.074,30.48 27.074,29.822 26.667,29.416 25.479,29.416 24.818,30.076 24.818,31.115 24.808,31.165 24.78,31.207 20.754,35.233 20.754,44.983 20.744,45.033 20.716,45.075 19.497,46.294 19.455,46.322 19.406,46.332 14.354,46.332 12.474,48.212 12.474,57.096 13.922,58.545 21.689,58.545
GND on InternalPlane2 (split plane): 151.763,4.47 0.51,4.47 0.51,95.072 151.763,95.072

## Keep-outs
Keep-Out Layer:
  the board outline again, w0.1

## Other copper
Top Layer:
  rectangle net GND: 4.191,81.128 9.5,83.414
  rectangle net GND: 2.921,81.153 5.512,87.02
Bottom Layer:
  rectangle net NetC219_1: 6.477,47.447 7.798,48.031
InternalPlane1 (plane layer: these items are gaps in the copper):
  rectangle: 0,0 151.841,4.445
  rectangle: 0,95.072 151.892,99.6
  lines w0.254: 12.344,48.158 14.3,46.203 19.406,46.203 20.625,44.983 20.625,35.179 24.689,31.115 24.689,30.023 25.425,29.286 26.721,29.286 27.203,29.769 27.203,30.48 27.203,31.598 22.504,36.297 22.504,57.912 21.742,58.674 13.868,58.674 12.344,57.15 12.344,48.158
  lines w0.3: 31.877,76.429 31.877,76.632 ; 31.877,82.042 31.877,82.321 ; 35.941,77.826 35.941,78.207 ; 42.723,54.813 42.723,54.991 ; 47.269,46.558 47.777,46.558 ; 47.498,46.558 43.637,46.558 43.104,46.025 40.03,46.025 39.7,46.355 39.7,54.483 39.802,54.585 41.326,54.585 41.58,54.331 41.58,53.823 41.808,53.594 42.469,53.594 42.723,53.848 42.723,54.991 ; 47.777,46.838 47.777,48.438 ; 31.877,76.632 31.877,74.397 31.928,74.346 33.96,74.346 42.901,74.346 45.288,71.958 45.288,62.814 44.628,62.154 44.628,59.588 42.723,57.683 ; 31.877,76.632 31.877,82.321 ; 31.877,82.321 32.055,82.499 35.941,82.499 35.941,78.207 ; 35.941,78.207 35.941,77.089 36.678,77.089 44.45,77.089 48.387,73.152 48.387,65.583 48.387,63.246 46.685,61.544 46.685,60.96 46.685,59.182 43.637,56.134 43.637,55.753 43.866,55.524 44.247,55.524 44.501,55.27 44.501,53.848 44.729,53.619 46.457,53.619 46.685,53.391 46.685,49.352 46.685,48.717 46.787,48.616 47.6,48.616 47.777,48.438 ; 42.723,54.991 42.139,55.575 42.139,56.337 42.723,56.921 ; 42.723,56.921 42.723,57.683 ; 42.723,56.921 42.723,57.683 ; 47.777,48.438 47.777,44.526 51.664,40.64 51.664,39.345 61.798,39.345 61.798,32.106 61.849,32.055 80.645,32.055 83.769,32.055 83.845,32.131 83.845,61.773 66.65,61.773 66.65,79.324 91.821,79.324 91.821,80.95 95.631,80.95 95.631,75.997 104.8,75.997 104.8,82.779 104.75,82.829 58.801,82.829 58.801,81.432 58.801,67.742 59.969,66.573 59.969,59.969 58.268,58.268 53.873,58.268 53.619,58.522 53.467,58.674 51.638,58.674 49.606,56.642 49.606,51.918 47.777,50.089 47.777,48.438
InternalPlane2 (plane layer: these items are gaps in the copper):
  rectangle: 0,95.072 151.994,99.6
  rectangle: 0,0 152.273,4.47

## Silkscreen, mask and mechanical layers (free items; w line width, h text height)
Top Overlay:
  lines w0.1: 0,4.877 152.273,4.877 ; 0,94.797 152.273,94.797
  text "SD171-5.0PCB2  2012.07.10" at 121.183,96.85 h1
Top Solder:
  rectangle: 63.678,86.081 68.402,88.57
  rectangle: 38.583,85.979 42.901,88.443
  rectangle: 12.395,85.09 17.348,87.63

## Dimensions
28.194,65.585 to 28.194,35.585 on Mechanical 1
28.194,65.585 to 58.194,65.585 on Mechanical 1
166.393,9.542 to 152.273,0 on Mechanical 1
166.393,18.432 to 166.393,9.542 on Mechanical 1
166.393,29.542 to 166.393,18.432 on Mechanical 1
166.393,38.432 to 166.393,29.542 on Mechanical 1
166.393,61.542 to 166.393,38.432 on Mechanical 1
166.393,70.432 to 166.393,61.542 on Mechanical 1
166.393,81.542 to 166.393,70.432 on Mechanical 1
166.393,90.432 to 166.393,81.542 on Mechanical 1
152.273,99.6 to 166.393,90.432 on Mechanical 1
-2.87,100.127 to -1.092,84.125 on Mechanical 1
-5.359,69.161 to -4.826,59.261 on Mechanical 1
0.599,47.514 to -4.166,-0.203 on Mechanical 1
0.599,57.414 to -3.937,100.127 on Mechanical 1
0,0 to 152.273,0 on Mechanical 1
0,99.6 to 0,0 on Mechanical 1